# EAGLE board TA_590_mock_sch (EAGLE 9.2.1)
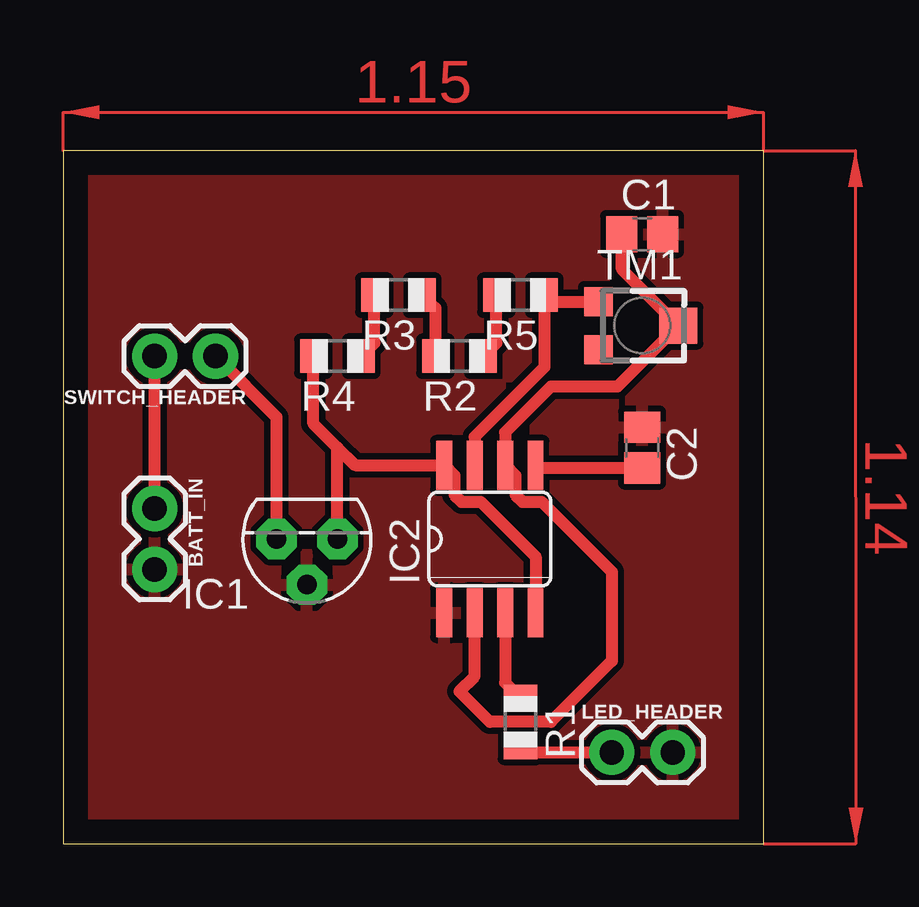
[diagram p0: board, top side]

Size 29.19 x 28.88 mm. Coordinates in mm from the lower left corner, seen from the top.
Outline: 0,0 29.19,0 29.19,28.88 0,28.88 0,0
Copper layers (1*16): Top 0.035mm / dielectric 1.5mm / Bottom 0.035mm
Design rules "default": minimum track width 6mil, minimum drill 0.35mm, track to track 6mil, track to pad 6mil, pad to pad 6mil, via to via 6mil, smd to smd 6mil, copper to edge 40mil, drill to drill 6mil, minimum pad ring 10mil, minimum via ring 8mil, stop-mask expansion 4mil, vias tented up to drill 0mil, thermal gap 10mil
Net classes: 0 default: clearance 0.254 mm

## Footprints (pad centres in the part's own frame; a part is rotated, then mirrored left to right if it is on the bottom)
1X02 = drill 1.016 pad 1.88: 1 0,0; 2 2.54,0
C0805 = smd 1.3 x 1.5: 1 -0.85,0; 2 0.85,0
TO92 = drill 0.813 pad 1.676 octagon: 1 -1.27,0; 2 0,1.905; 3 1.27,0
SO08 = smd 0.66 x 2.032: 1 -1.905,-3.073; 2 -0.635,-3.073; 3 0.635,-3.073; 4 1.905,-3.073; 5 1.905,3.073; 6 0.635,3.073; 7 -0.635,3.073; 8 -1.905,3.073
R0805 = smd 1.1 x 1.4: 1 -1,0; 2 1,0
TC33X = smd 1.2 x 1.2: 1 -1,-1.825; 3 1,-1.825 | smd 1.5 x 1.6: 2 0,1.5

## Placement (x,y rotation side)
BATT_IN  [1X02]  3.81,13.97 270 top
C1  100 uF  [C0805]  24.13,25.4 0 top
C2  0.01 uF  [C0805]  24.13,16.51 270 top
IC1  7805L  [TO92]  10.16,12.7 180 top
IC2  NE555D  [SO08]  17.78,12.7 0 top
LED_HEADER  [1X02]  22.86,3.81 0 top
R1  220  [R0805]  19.05,5.08 270 top
R2  10  [R0805]  16.51,20.32 180 top
R3  10  [R0805]  13.97,22.86 180 top
R4  215  [R0805]  11.43,20.32 180 top
R5  10  [R0805]  19.05,22.86 180 top
SWITCH_HEADER  [1X02]  6.35,20.32 180 top
TM1  [TC33X]  24.13,21.59 270 top

## Library data of the parts
BATT_IN LED_HEADER SWITCH_HEADER = SparkFun-Connectors
C1 C2 IC1 IC2 R1-R5 TM1 = adafruit

## Nets
GND: BATT_IN.2 C1.2 C2.1 IC1.2 IC2.1 LED_HEADER.2
N$1: BATT_IN.1 SWITCH_HEADER.2
N$2: IC1.3 SWITCH_HEADER.1
N$3: R2.1 R5.2
N$4: R3.2 R4.1
N$5: R2.2 R3.1
N$6: IC2.3 R1.1
N$7: IC2.7 R5.1 TM1.1
N$8: C1.1 IC2.2 IC2.6 TM1.2
N$10: C2.2 IC2.5
N$11: LED_HEADER.1 R1.2
PWR: IC1.1 IC2.4 IC2.8 R4.2

## Tracks (layer width: path | path; a pad name or v marks a point on that pad's centre or on a via)
GND
  pour Top: 0,29.21 0,0 29.21,0 29.21,29.21
N$1
  Top 0.508: BATT_IN.1 SWITCH_HEADER.2
N$2
  Top 0.508: SWITCH_HEADER.1 8.89,17.78 IC1.3
N$3
  Top 0.508: R2.1 18.05,20.86 R5.2
N$4
  Top 0.508: R4.1 12.97,20.86 R3.2
N$5
  Top 0.508: R3.1 15.51,22.32 R2.2
N$6
  Top 0.508: IC2.3 18.41,6.71 R1.1
N$7
  Top 0.508: TM1.1 20.32,22.59 R5.1 20.05,19.86 17.14,16.95 IC2.7
N$8
  Top 0.508: C1.1 23.28,23.94 TM1.2 23.09,19.05 20.32,19.05 18.41,17.14 IC2.6 18.85,15.34 18.85,14.55 19.14,14.25 19.94,14.25 22.86,11.33 22.86,7.62 20.32,5.08 17.78,5.08 16.51,6.35 17.14,6.99 IC2.2
N$10
  Top 0.508: IC2.5 19.8,15.66 C2.2
N$11
  Top 0.508: R1.2 19.32,3.81 LED_HEADER.1
PWR
  Top 0.508: 11.43,16.51 10.43,17.51 R4.2 | IC1.1 11.43,16.51 | 11.43,16.51 12.17,15.77 IC2.8 16.31,15.34 16.31,14.55 16.6,14.25 17.4,14.25 19.68,11.96 IC2.4
(copper drawn outside any net)
  shapes: Top area x2